# Altium PCB Circle.PcbDoc
Units mil, origin at the board's own origin, x right, y up, seen from the top; angles counter-clockwise.
Board outline 1200 x 1200 mil, 2 copper layers (Top Layer, Bottom Layer); 72 components, 0 nets, 144 pads, 0 vias.
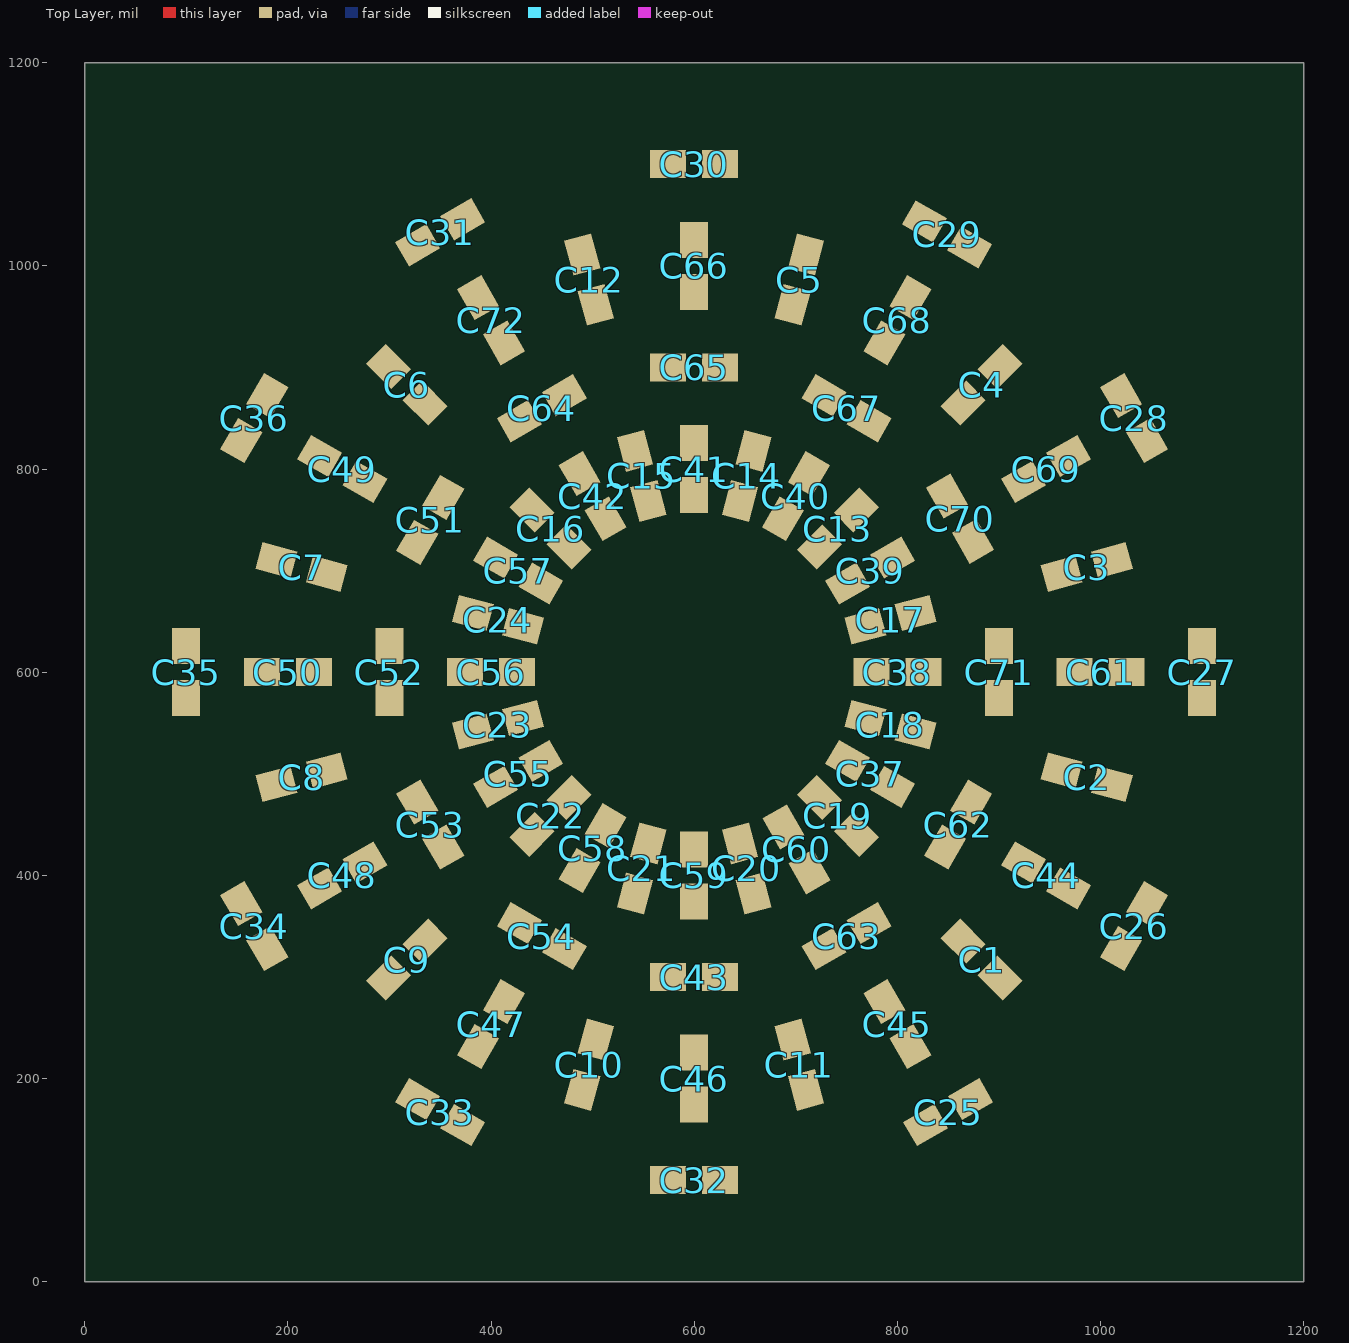
[diagram p0: Top Layer view]
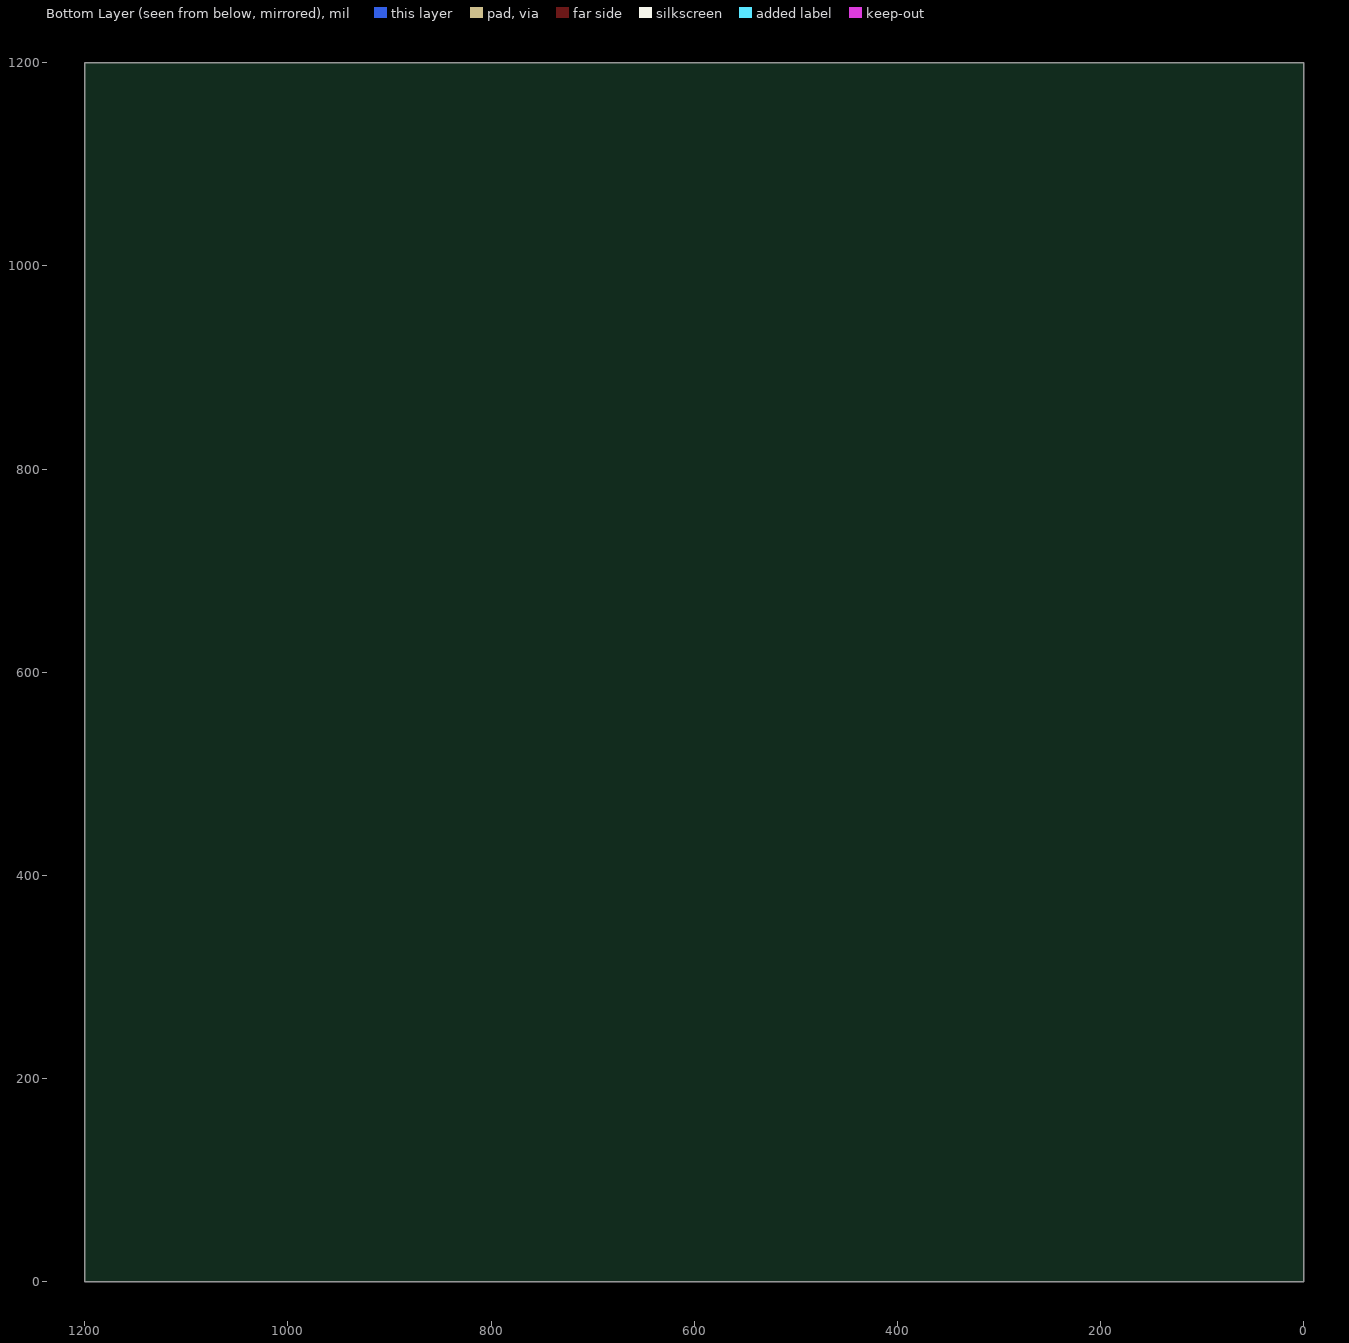
[diagram p1: Bottom Layer view, seen from below]

## Layer stack, top to bottom
Top Solder: solder mask 0.4, Solder Resist, Dk 3.5
Top Layer: signal copper 1.4
Dielectric 1: dielectric 12.6, FR-4, Dk 4.8
Bottom Layer: signal copper 1.4
Bottom Solder: solder mask 0.4, Solder Resist, Dk 3.5

## Board outline
0,0 0,1200 1200,1200 1200,0

## Design rules (kind name [scope] priority, off if disabled: settings)
Clearance [All] p1: gap=10
PolygonConnect [All] p1: connectstyle=Relief reliefconductorwidth=10 reliefentries=4 polygonreliefangle="90 Angle" airgapwidth=10
RoutingVias [All] p1: holewidth=28 width=50 viastyle="Through Hole" minholewidth=28 minwidth=50 maxholewidth=28 maxwidth=50
SolderMaskExpansion [All] p1: expansion=4
Width [All] p1: maxlimit=10 minlimit=10 preferedwidth=10
30 further rules are at their usual default settings.

## Components (designator, comment, footprint, x,y, rotation, side; value= is the part's Value field where it differs from the comment)
C1 "100nF" CAP-0402-ROT 882.84,317.16 r45 top
C2 "100nF" CAP-0402-ROT 986.37,496.47 r75 top
C3 "100nF" CAP-0402-ROT 986.37,703.53 r105 top
C4 "100nF" CAP-0402-ROT 882.84,882.84 r135 top
C5 "100nF" CAP-0402-ROT 703.53,986.37 r165 top
C6 "100nF" CAP-0402-ROT 317.16,882.84 r225 top
C7 "100nF" CAP-0402-ROT 213.63,703.53 r255 top
C8 "100nF" CAP-0402-ROT 213.63,496.47 r285 top
C9 "100nF" CAP-0402-ROT 317.16,317.16 r315 top
C10 "100nF" CAP-0402-ROT 496.47,213.63 r345 top
C11 "100nF" CAP-0402-ROT 703.53,213.63 r15 top
C12 "100nF" CAP-0402-ROT 496.47,986.37 r195 top
C13 "100nF" CAP-0402-ROT 741.42,741.42 r135 top
C14 "100nF" CAP-0402-ROT 651.76,793.19 r165 top
C15 "100nF" CAP-0402-ROT 548.24,793.19 r195 top
C16 "100nF" CAP-0402-ROT 458.58,741.42 r225 top
C17 "100nF" CAP-0402-ROT 793.19,651.76 r105 top
C18 "100nF" CAP-0402-ROT 793.19,548.24 r75 top
C19 "100nF" CAP-0402-ROT 741.42,458.58 r45 top
C20 "100nF" CAP-0402-ROT 651.76,406.82 r15 top
C21 "100nF" CAP-0402-ROT 548.24,406.82 r345 top
C22 "100nF" CAP-0402-ROT 458.58,458.58 r315 top
C23 "100nF" CAP-0402-ROT 406.82,548.24 r285 top
C24 "100nF" CAP-0402-ROT 406.82,651.76 r255 top
C25 "100nF" CAP-0402-ROT 850,166.99 r300 top
C26 "100nF" CAP-0402-ROT 1033.01,350 r330 top
C27 "100nF" CAP-0402-ROT 1100,600 r0 top
C28 "100nF" CAP-0402-ROT 1033.01,850 r30 top
C29 "100nF" CAP-0402-ROT 848.82,1030.97 r60 top
C30 "100nF" CAP-0402-ROT 600,1100 r90 top
C31 "100nF" CAP-0402-ROT 350,1033.01 r120 top
C32 "100nF" CAP-0402-ROT 600,100 r270 top
C33 "100nF" CAP-0402-ROT 350,166.99 r240 top
C34 "100nF" CAP-0402-ROT 166.99,350 r210 top
C35 "100nF" CAP-0402-ROT 100,600 r180 top
C36 "100nF" CAP-0402-ROT 166.99,850 r150 top
C37 "100nF" CAP-0402-ROT 773.21,500 r60 top
C38 "100nF" CAP-0402-ROT 800,600 r90 top
C39 "100nF" CAP-0402-ROT 773.21,700 r120 top
C40 "100nF" CAP-0402-ROT 700,773.21 r150 top
C41 "100nF" CAP-0402-ROT 600,800 r180 top
C42 "100nF" CAP-0402-ROT 500,773.21 r210 top
C43 "100nF" CAP-0402-ROT 600,300 r270 top
C44 "100nF" CAP-0402-ROT 946.41,400 r60 top
C45 "100nF" CAP-0402-ROT 800,253.59 r30 top
C46 "100nF" CAP-0402-ROT 600,200 r0 top
C47 "100nF" CAP-0402-ROT 400,253.59 r330 top
C48 "100nF" CAP-0402-ROT 253.59,400 r300 top
C49 "100nF" CAP-0402-ROT 253.59,800 r240 top
C50 "100nF" CAP-0402-ROT 200,600 r270 top
C51 "100nF" CAP-0402-ROT 340.19,750 r150 top
C52 "100nF" CAP-0402-ROT 300,600 r180 top
C53 "100nF" CAP-0402-ROT 340.19,450 r210 top
C54 "100nF" CAP-0402-ROT 450,340.19 r240 top
C55 "100nF" CAP-0402-ROT 426.8,500 r300 top
C56 "100nF" CAP-0402-ROT 400,600 r270 top
C57 "100nF" CAP-0402-ROT 426.8,700 r240 top
C58 "100nF" CAP-0402-ROT 500,426.8 r330 top
C59 "100nF" CAP-0402-ROT 600,400 r0 top
C60 "100nF" CAP-0402-ROT 700.7,425.59 r30 top
C61 "100nF" CAP-0402-ROT 1000,600 r90 top
C62 "100nF" CAP-0402-ROT 859.81,450 r330 top
C63 "100nF" CAP-0402-ROT 750,340.19 r300 top
C64 "100nF" CAP-0402-ROT 450,859.81 r120 top
C65 "100nF" CAP-0402-ROT 600,900 r90 top
C66 "100nF" CAP-0402-ROT 600,1000 r180 top
C67 "100nF" CAP-0402-ROT 750,859.81 r60 top
C68 "100nF" CAP-0402-ROT 800,946.41 r150 top
C69 "100nF" CAP-0402-ROT 946.41,800 r120 top
C70 "100nF" CAP-0402-ROT 861.61,751.04 r30 top
C71 "100nF" CAP-0402-ROT 900,600 r0 top
C72 "100nF" CAP-0402-ROT 400,946.41 r210 top

## Footprints (in the part's own frame and the unit in brackets; to place one, negate y for a bottom-side part, rotate by r counter-clockwise, add the part's x,y. Pads: shape width x height; smd on the part's side, far side on the other; paste and mask are expansions set on the pad)
CAP-0402-ROT [mm] "Capacitor, SMD, 0402"
  rect 0.7x0.9 smd: 1(0,-0.65) 2(0,0.65)
  body extent -0.25,-0.5 0.25,0.5, height 0.55

## Part data
C1 C2 C3 C4 C5 C6 C7 C8 C9 C10 C11 C12 C13 C14 C15 C16 C17 C18 C19 C20 C21 C22 C23 C24 C25 C26 C27 C28 C29 C30 C31 C32 C33 C34 C35 C36 C37 C38 C39 C40 C41 C42 C43 C44 C45 C46 C47 C48 C49 C50 C51 C52 C53 C54 C55 C56 C57 C58 C59 C60 C61 C62 C63 C64 C65 C66 C67 C68 C69 C70 C71 C72: library part Cap, "Capacitor"

## Nets (pads, with @x,y where several pads share a name; then routed paths per layer and width w, separated by ;. In a path a pad name is that pad's centre, name@x,y a point inside that pad or via, vN(x,y) a via of type N, cw(c..) or ccw(c..) an arc to the next point about the centre after c; other vN are vias at no path point)
pads on no net: C1.1 C1.2 C2.1 C2.2 C3.1 C3.2 C4.1 C4.2 C5.1 C5.2 C6.1 C6.2 C7.1 C7.2 C8.1 C8.2 C9.1 C9.2 C10.1 C10.2 C11.1 C11.2 C12.1 C12.2 C13.1 C13.2 C14.1 C14.2 C15.1 C15.2 C16.1 C16.2 C17.1 C17.2 C18.1 C18.2 C19.1 C19.2 C20.1 C20.2 C21.1 C21.2 C22.1 C22.2 C23.1 C23.2 C24.1 C24.2 C25.1 C25.2 C26.1 C26.2 C27.1 C27.2 C28.1 C28.2 C29.1 C29.2 C30.1 C30.2 C31.1 C31.2 C32.1 C32.2 C33.1 C33.2 C34.1 C34.2 C35.1 C35.2 C36.1 C36.2 C37.1 C37.2 C38.1 C38.2 C39.1 C39.2 C40.1 C40.2 C41.1 C41.2 C42.1 C42.2 C43.1 C43.2 C44.1 C44.2 C45.1 C45.2 C46.1 C46.2 C47.1 C47.2 C48.1 C48.2 C49.1 C49.2 C50.1 C50.2 C51.1 C51.2 C52.1 C52.2 C53.1 C53.2 C54.1 C54.2 C55.1 C55.2 C56.1 C56.2 C57.1 C57.2 C58.1 C58.2 C59.1 C59.2 C60.1 C60.2 C61.1 C61.2 C62.1 C62.2 C63.1 C63.2 C64.1 C64.2 C65.1 C65.2 C66.1 C66.2 C67.1 C67.2 C68.1 C68.2 C69.1 C69.2 C70.1 C70.2 C71.1 C71.2 C72.1 C72.2

## Silkscreen, mask and mechanical layers (free items; w line width, h text height)
BoardOutline:
  the board outline again, w8